# Altium PCB FC_F7_PCB.PcbDoc (part 2 of 2)
Units mm, origin at the board's own origin, x right, y up, seen from the top; angles counter-clockwise.
Board outline 36 x 36 mm, 4 copper layers (Top Layer, Ground Plane, Power Plane, Bottom Layer), stack 1.586 mm thick; 88 components, 73 nets, 327 pads, 57 vias.
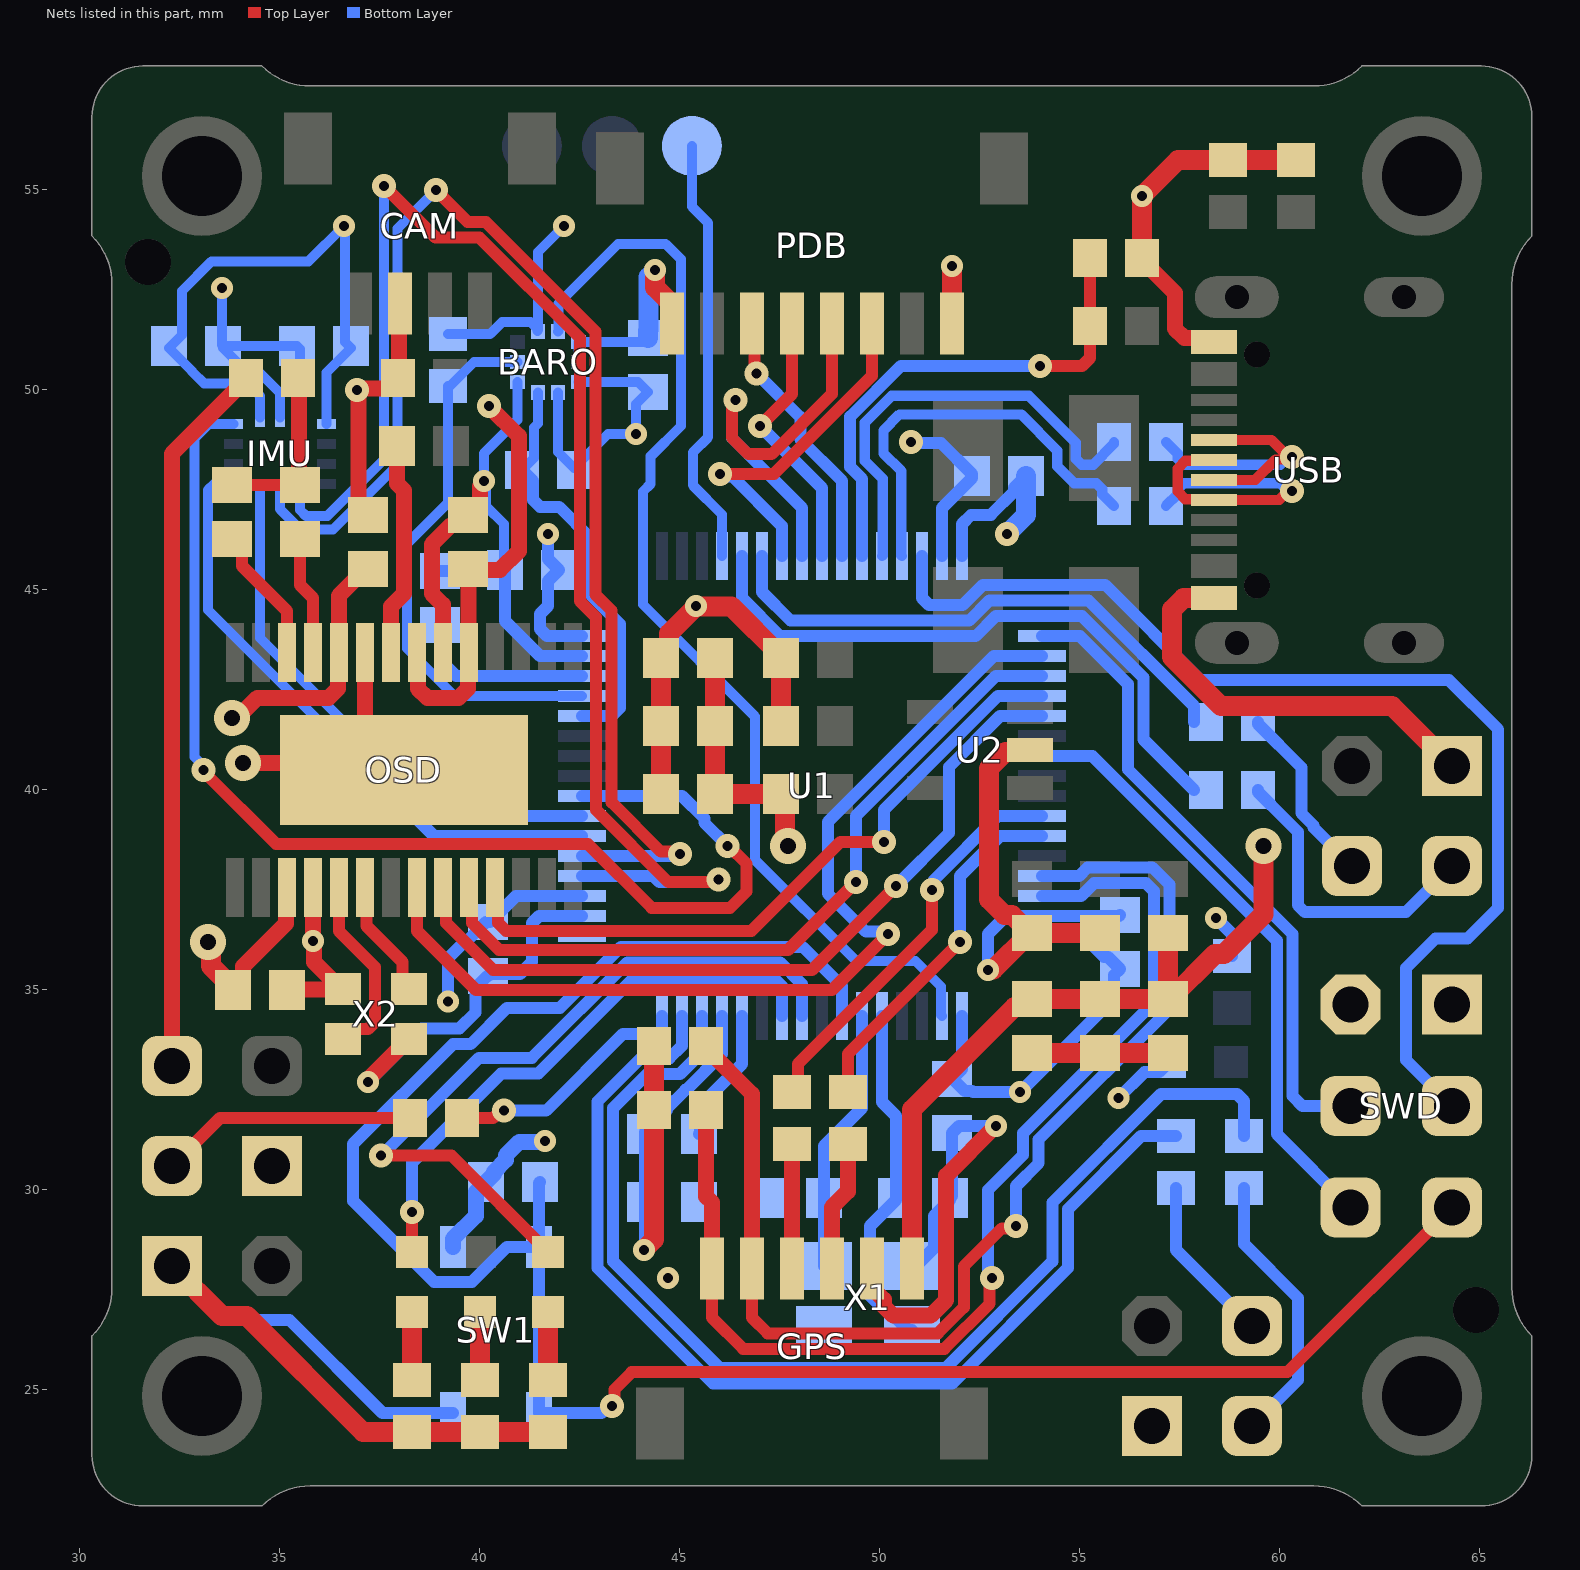
[diagram p4: the nets of this part, all layers, seen from the top]

## Via types
v1: diameter 0.6, hole 0.25, Top Layer to Bottom Layer, 30 vias
v2: diameter 0.55, hole 0.25, Top Layer to Bottom Layer, 21 vias
v3: diameter 0.9, hole 0.4, Top Layer to Bottom Layer, 6 vias

## Nets (pads, with @x,y where several pads share a name; then routed paths per layer and width w, separated by ;. In a path a pad name is that pad's centre, name@x,y a point inside that pad or via, vN(x,y) a via of type N, cw(c..) or ccw(c..) an arc to the next point about the centre after c; other vN are vias at no path point) (continued)
GND: BARO.3 BARO.8 BARO.9 C1.2 C2.1 C3.2 C4.1 C5.1 C6.1 C7.1 C8.1 C9.1 C10.1 C11.1 C12.1 C13.1 C14.1 C15.1 C16.1 C17.1 C18.1 C19.1 C20.1 C21.1 C22.2 C23.2 C24.2 C28.1 C29.1 C30.1 CAM.2 G.1 GPS.2 IMU.6 IMU.7 J2.1 J6.1 J11.1 OSD.4 OSD.20 OSD.23 OSD.29 PDB.1 PDB.8 R1.1 R9.2 R13.2 R14.2 R17.2 R18.2 R19.2 R23.1 SW1.3 SW1.4 SWD.6 U1.12 U1.18 U1.31 U1.47 U1.63 U2.2 USB.A1_B12 USB.B1_A12 X1.2 X1.4 X2.2 X2.4 | length 147.9
  Top Layer w0.4: v3(34.08,40.68) 36.48,40.68 OSD.29@37.2,41.4 ; C28.1@35.2,35.025 35.213,35.013 36.562,35.013 X2.4@36.575,35.025 36.525,35.025 35.854,35.696 35.854,36.196 v2(35.825,36.224) OSD.4@35.825,37.562 ; v1@36.921,49.946 37.013,50.038 37.725,50.038 37.975,50.288 37.975,52.143 CAM.2@38,52.168 ; v1(36.921,50) 36.959,49.962 36.959,47.116 C29.1@37.2,46.875 ; OSD.23@37.125,43.438 37.125,41.475 OSD.29@37.2,41.4 ; v2(37.2,32.7) 37.2,32.75 X2.2@38.225,33.775 ; OSD.29@38.1,40.5 OSD.29@37.2,41.4 ; OSD.20@39.075,43.438 39.075,44.634 38.8,44.909 38.8,46.141 39.284,46.625 39.5,46.625 40,47.125 40,47.586 40.096,47.682 v2(40.096,47.723) ; GPS.2@49.8,28.032 49.9,27.932 49.9,27.457 50.1,27.257 50.1,27.091 50.334,26.857 51.266,26.857 51.656,27.247 51.656,30.356 v2(52.9,31.6) ; R9.2@56.55,53.3 56.55,53.25 57.375,52.425 57.375,51.534 57.609,51.3 58.245,51.3 USB.B1_A12@58.345,51.2
  Top Layer w0.5: J6.1@32.3,28.1 33.546,26.854 34.171,26.854 37.075,23.95 R19.2@41.7,23.95 ; v2(44.371,52.998) 44.381,52.988 44.381,52.562 44.75,52.193 44.75,51.718 PDB.1@44.8,51.668 ; C5.1@44.525,39.9 C6.1@44.525,41.6 C7.1@44.525,43.3 44.725,43.5 44.725,43.911 45.4,44.586 v2(45.4,44.6) 45.41,44.59 46.285,44.59 47.525,43.35 C4.1@47.525,43.3 C9.1@47.525,41.6 ; PDB.8@51.8,51.668 v2(51.8,53.1) ; v2@52.71,35.51 52.835,35.51 C8.1@53.75,36.425 ; U2.2@53.75,41 53.7,40.95 53.139,40.95 52.725,40.536 52.725,37.264 53.114,36.875 53.3,36.875 C8.1@53.75,36.425 ; C13.1@53.8,33.425 C11.1@55.5,33.425 C12.1@57.2,33.425 ; C10.1@55.5,36.425 C8.1@53.75,36.425 ; R9.2@56.55,53.3 v2(56.55,54.85) 57.45,55.75 R13.2@58.7,55.75 R14.2@60.4,55.75 ; USB.A1_B12@58.345,44.8 57.593,44.8 57.3,44.507 57.3,43.32 58.52,42.1 62.8,42.1 G.1@64.3,40.6
  Bottom Layer w0.25: v2(33.549,52.551) 33.549,51.126 C23.2@33.575,51.1 ; IMU.6@35,49.313 35,49.925 34.426,50.499 34.126,50.499 33.575,51.05 33.625,51.1 C22.2@35.425,51.1 35.5,51.025 IMU.7@35.5,49.313 ; C17.1@40.6,45.475 40.6,46.649 40.153,47.096 40.153,47.666 v2(40.096,47.723) 40.096,48.414 40.938,49.255 BARO.3@40.938,50.2 ; BARO.9@42.463,50.7 BARO.8@42.463,51.2 44.1,51.2 C24.2@44.2,51.3
  Bottom Layer w0.3: J6.1@32.3,28.1 33.646,26.754 35.234,26.754 37.563,24.425 SW1.3@39.325,24.425 ; v2(37.2,32.7) 38.537,34.037 39.485,34.037 39.883,34.435 39.883,35.05 40.183,35.35 C18.1@40.2,35.35 40.25,35.4 41,35.4 41.3,35.7 41.3,36.674 41.476,36.85 U1.18@42.55,36.85 ; C21.1@39,45.475 40.6,45.475 C17.1@40.625,45.5 40.625,44.225 41.5,43.35 U1.31@42.55,43.35 ; C20.1@45.475,31.4 45.5,31.425 45.5,32.1 46.55,33.15 U1.12@46.55,34.35 ; v1(50.771,48.703) 50.795,48.679 51.521,48.679 52.3,47.9 52.3,47.8 51.55,47.05 U1.47@51.55,45.85 ; X1.4@50.8,28.1 50.9,28.1 51.35,28.55 51.35,29.35 51.75,29.75 C1.2@51.75,29.8 51.8,29.85 C14.1@51.8,31.425 51.975,31.6 v2(52.9,31.6) ; v2(52.7,35.5) 52.7,36.4 53.15,36.85 U1.63@54.05,36.85 55.975,36.85 C15.1@56,36.875 ; v2(58.4,36.8) 58.8,36.4 R1.1@58.8,35.85
  Bottom Layer w0.4: SW1.4@39.325,28.575 39.325,28.775 39.9,29.35 39.9,29.95 40.354,30.404 40.354,30.454 40.65,30.75 40.65,30.866 40.985,31.2 41.602,31.2 v2(41.63,31.229)
  Bottom Layer w0.5: C24.2@44.2,51.3 44.2,51.487 44.213,51.5 44.213,52.826 44.371,52.984 v2(44.371,52.998)
  other v2: 44.7,27.8
GPS_IN: GPS.3 R2.1 | length 3.3
  Top Layer w0.4: GPS.3@48.8,28.032 48.8,29.566 49.2,29.966 R2.1@49.2,31.15
GPS_OUT: GPS.4 R5.1 | length 3.1
  Top Layer w0.4: GPS.4@47.8,28.032 R5.1@47.8,31.15
HSE_IN: C1.1 U1.5 X1.1 | length 8.8
  Bottom Layer w0.3: U1.5@50.05,34.35 50.05,32.2 50.4,31.85 50.4,29.75 49.75,29.1 49.75,27.355 49.955,27.15 50.05,27.15 50.7,26.5 X1.1@50.8,26.5
HSE_OUT: C2.2 U1.6 X1.3 | length 6.6
  Bottom Layer w0.3: X1.3@48.6,28.1 C2.2@48.6,29.8 48.6,31.1 49.55,32.05 U1.6@49.55,34.35
I2C1_EXTI: BARO.7 U1.2 | length 27.8
  Bottom Layer w0.25: BARO.7@41.95,51.463 41.965,51.478 41.965,52.165 43.452,53.652 44.642,53.652 45.025,53.269 45.025,49.1 44.269,48.344 44.269,47.655 44.075,47.462 44.075,44.638 46.871,41.842 46.871,38.257 49.407,35.721 50.889,35.721 51.525,35.085 51.525,34.375 U1.2@51.55,34.35
I2C1_SCL: GPS.5 R3.1 U1.61 | length 29.3
  Top Layer w0.3: GPS.5@46.8,28.032 46.8,26.807 47.19,26.417 51.448,26.417 52.096,27.065 52.096,28.092 53.047,29.043 53.343,29.043 v1(53.4,29.1)
  Top Layer w0.4: R3.1@45.65,33.6 45.65,33.55 46.8,32.4 GPS.5@46.8,28.032
  Bottom Layer w0.3: v1(53.4,29.1) 53.4,30.1 53.969,30.669 53.969,31.264 57.24,34.535 57.24,37.632 56.807,38.065 55.193,38.065 54.978,37.85 U1.61@54.05,37.85
I2C1_SDA: GPS.6 R4.1 U1.62 | length 28.1
  Top Layer w0.3: GPS.6@45.8,28.032 45.8,26.807 46.58,26.027 51.609,26.027 52.743,27.16 52.743,27.743 v1(52.8,27.8)
  Top Layer w0.4: R4.1@45.65,32 45.65,29.841 45.8,29.691 GPS.6@45.8,28.032
  Bottom Layer w0.3: v1(52.8,27.8) 52.8,27.881 52.696,27.985 52.696,29.996 53.579,30.879 53.579,31.426 56.85,34.697 56.85,37.47 56.645,37.675 55.355,37.675 55.03,37.35 U1.62@54.05,37.35
I2C2_SCL: BARO.2 R7.2 U1.28 | length 10.4
  Bottom Layer w0.25: R7.2@41.05,48 41.35,48.3 41.35,49.063 41.45,49.163 BARO.2@41.45,49.937
  Bottom Layer w0.3: R7.2@41.05,48 41.325,47.725 41.325,47.255 41.501,47.079 41.981,47.079 42.775,46.285 42.775,44.87 43.5,44.145 43.5,42.055 43.295,41.85 U1.28@42.55,41.85
I2C2_SDA: BARO.4 R6.2 U1.29 | length 13.8
  Bottom Layer w0.25: BARO.4@40.938,50.7 39.85,50.7 39.25,50.1 R6.2@39.2,50.1 39.2,47.183 38.175,46.158 38.175,43.54 39.365,42.35 U1.29@42.55,42.35
NetC25_2: C25.2 C26.2 R22.1 | length 4.4
  Top Layer w0.3: C25.2@33.8,47.625 C26.2@35.5,47.625
  Top Layer w0.4: R22.1@35.45,50.3 35.475,50.275 35.475,47.65 C26.2@35.5,47.625
NetDATA_2: D.2 R19.1 | length 1.7
  Top Layer w0.5: R19.1@41.7,25.25 D.2@41.7,26.95
NetPWR_2: P.2 R18.1 | length 1.7
  Top Layer w0.5: R18.1@40,25.25 P.2@40,26.95
NetR17_1: R17.1 S.2 | length 1.7
  Top Layer w0.5: R17.1@38.3,25.25 S.2@38.3,26.95
NRST: C3.1 SW1.1 SW1.2 SWD.2 U1.7 | length 53.6
  Top Layer w0.3: v1(43.3,24.6) 43.357,24.657 43.357,25.009 43.794,25.446 60.186,25.446 SWD.2@64.3,29.56
  Bottom Layer w0.3: C3.1@41.5,30.2 41.475,30.175 SW1.2@41.475,28.575 ; v1(43.3,24.6) 43.219,24.6 43.044,24.425 SW1.1@41.475,24.425 SW1.2@41.475,28.575 ; U1.7@49.05,34.35 49.05,35.095 48.065,36.08 43.525,36.08 41.995,34.55 40.671,34.55 39.768,33.647 39.324,33.647 36.825,31.148 36.825,29.73 38.855,27.7 39.795,27.7 40.67,28.575 SW1.2@41.475,28.575
OSD_CLKIN: OSD.5 X2.1 | length 4.7
  Top Layer w0.3: OSD.5@36.475,37.562 36.475,36.47 37.375,35.57 37.375,34.201 37.199,34.025 36.825,34.025 X2.1@36.575,33.775
OSD_XFB: OSD.6 X2.3 | length 3
  Top Layer w0.3: OSD.6@37.125,37.562 37.162,37.525 37.162,36.6 38.063,35.699 38.063,35.187 X2.3@38.225,35.025
PIT_MODE_I/O: pad.5 U1.36 | length 10.9
  Bottom Layer w0.25: pad.5@45.3,56.1 45.3,54.581 45.705,54.176 45.705,48.818 45.321,48.434 45.321,47.619 46.05,46.89 U1.36@46.05,45.85
REC_RX: R21.1 RX6.1 | length 4.6
  Bottom Layer w0.3: R21.1@59.45,41.7 59.45,41.65 60.532,40.568 60.532,39.419 60.842,39.11 60.842,39.058 RX6.1@61.8,38.1
REC_TX: R20.1 TX6.1 | length 7.7
  Bottom Layer w0.3: R20.1@59.45,40 59.45,39.95 60.142,39.258 ; 60.142,39.258 60.446,38.954 60.446,37.122 60.622,36.946 63.146,36.946 TX6.1@64.3,38.1
S-AUD: J3.1 R10.1 | length 6.4
  Top Layer w0.3: J3.1@32.3,30.6 33.5,31.8 R10.1@38.25,31.8
SAG: C26.1 OSD.25 | length 3
  Top Layer w0.3: C26.1@35.5,46.275 35.5,45.125 35.825,44.8 OSD.25@35.825,43.438
SPARE_RX: J10.1 R16.1 | length 4.2
  Bottom Layer w0.3: R16.1@57.4,30.05 57.4,28.5 J10.1@59.3,26.6
SPARE_TX: J9.1 R15.1 | length 7
  Bottom Layer w0.3: R15.1@59.1,30.05 59.1,28.652 60.454,27.298 60.454,25.254 J9.1@59.3,24.1
SPI1_EXTI: IMU.4 U1.24 | length 30.3
  Top Layer w0.3: v1(33.092,40.499) 33.092,40.46 34.903,38.65 42.695,38.65 44.29,37.054 46.253,37.054 46.665,37.467 46.665,38.154 46.219,38.6 v1(46.192,38.6)
  Bottom Layer w0.25: v1(33.092,40.499) 33.092,40.593 32.864,40.822 32.864,48.789 33.225,49.15 IMU.4@33.838,49.15
  Bottom Layer w0.3: U1.24@42.55,39.85 45.05,39.85 45.61,39.29 45.61,39.182 v1(46.192,38.6)
SPI1_MISO: IMU.1 U1.22 | length 15.4
  Bottom Layer w0.25: IMU.1@33.838,47.65 33.35,47.65 33.204,47.504 33.204,44.496 38.3,39.4
  Bottom Layer w0.3: 38.3,39.4 38.85,38.85 U1.22@42.55,38.85
SPI1_MOSI: IMU.14 U1.23 | length 13.6
  Bottom Layer w0.25: IMU.14@34.5,47.488 34.5,43.8 38.5,39.8
  Bottom Layer w0.3: 38.5,39.8 38.95,39.35 U1.23@42.55,39.35
SPI1_NCS: IMU.12 U1.20 | length 35.8
  Top Layer w0.3: v1(37.6,55.1) 38.889,53.811 39.986,53.811 42.496,51.301 42.496,44.725 42.9,44.32 42.9,39.504 44.708,37.696 45.817,37.696 45.88,37.758 v1(45.961,37.758)
  Bottom Layer w0.25: IMU.12@35.5,47.488 35.5,47 35.646,46.854 36.188,46.854 37.6,48.265 v1(37.6,55.1)
  Bottom Layer w0.3: U1.20@42.55,37.85 44.332,37.85 44.486,37.696 45.817,37.696 45.88,37.758 v1(45.961,37.758)
SPI1_SCK: IMU.13 U1.21 | length 33.7
  Top Layer w0.3: v1(38.9,54.994) 39.693,54.201 40.147,54.201 42.886,51.463 42.886,44.886 43.29,44.482 43.29,39.69 44.523,38.457 44.943,38.457 v1(45,38.4)
  Bottom Layer w0.25: IMU.13@35,47.488 35,47.019 35.506,46.514 36.329,46.514 37.94,48.125 37.94,54.034 v1(38.9,54.994)
  Bottom Layer w0.3: U1.21@42.55,38.35 44.95,38.35 v1(45,38.4)
SPI3_MISO: OSD.11 U1.52 | length 17.5
  Top Layer w0.3: OSD.11@40.375,37.562 40.45,37.487 40.45,36.68 40.655,36.474 46.782,36.474 49.008,38.7 v1(50.1,38.7)
  Bottom Layer w0.3: v1(50.1,38.7) 50.1,39.502 52.948,42.35 U1.52@54.05,42.35
SPI3_MOSI: OSD.9 U1.53 | length 19.9
  Top Layer w0.3: OSD.9@39.075,37.562 39.15,37.487 39.15,36.68 40.33,35.5 48.3,35.5 v1(50.4,37.6)
  Bottom Layer w0.3: v1(50.4,37.6) 51.729,38.929 51.729,40.579 53,41.85 U1.53@54.05,41.85
SPI3_NCS: OSD.8 U1.50 | length 24.8
  Top Layer w0.3: OSD.8@38.425,37.562 38.425,36.475 39.9,35 48.8,35 v1(50.2,36.4)
  Bottom Layer w0.3: v1(50.2,36.4) 50.143,36.457 49.647,36.457 48.696,37.408 48.696,39.201 52.845,43.35 U1.50@54.05,43.35
SPI3_SCK: OSD.10 U1.51 | length 19.3
  Top Layer w0.3: OSD.10@39.725,37.562 39.8,37.487 39.8,36.68 40.48,36 47.7,36 v1(49.4,37.7)
  Bottom Layer w0.3: v1(49.4,37.7) 49.396,37.704 49.396,39.349 52.897,42.85 U1.51@54.05,42.85
STATUS_LED: S.1 U1.10 | length 14.2
  Top Layer w0.3: S.1@38.3,28.45 v1(38.3,29.446)
  Bottom Layer w0.3: v1(38.3,29.446) 38.3,30.681 40.531,32.912 41.46,32.912 43.848,35.3 47.345,35.3 47.55,35.095 U1.10@47.55,34.35
SWCLK: SWD.3 U1.49 | length 16.2
  Bottom Layer w0.3: U1.49@54.05,43.85 54.995,43.85 56.197,42.648 56.197,40.514 60.315,36.397 60.315,32.345 60.56,32.1 SWD.3@61.76,32.1
SWDIO: SWD.4 U1.46 | length 28.6
  Bottom Layer w0.3: U1.46@51.05,45.85 51.05,44.8 51.226,44.624 52.069,44.624 52.575,45.13 55.631,45.13 58.01,42.751 64.22,42.751 65.454,41.517 65.454,37.054 64.692,36.292 63.892,36.292 63.146,35.546 63.146,33.254 SWD.4@64.3,32.1
"TIM1_CH1 (M2)": PDB.4 U1.41 | length 6.8
  Top Layer w0.3: v1(47,49.1) 47.8,49.9 PDB.4@47.8,51.668
  Bottom Layer w0.3: v1(47,49.1) 48.55,47.55 U1.41@48.55,45.85
"TIM1_CH2 (M1)": PDB.3 U1.42 | length 6.7
  Top Layer w0.3: PDB.3@46.8,51.668 46.857,51.611 46.857,50.475 v1(46.914,50.418)
  Bottom Layer w0.3: v1(46.914,50.418) 48.011,49.321 48.011,48.766 49.05,47.727 U1.42@49.05,45.85
"TIM3_CH3 (M4)": PDB.6 U1.39 | length 9
  Top Layer w0.3: v1(46,47.9) 47.347,47.9 49.8,50.353 PDB.6@49.8,51.668
  Bottom Layer w0.3: v1(46,47.9) 46.057,47.843 46.302,47.843 47.55,46.595 U1.39@47.55,45.85
"TIM3_CH4 (M3)": PDB.5 U1.40 | length 10.7
  Top Layer w0.3: v1(46.384,49.748) 46.384,49.667 46.296,49.579 46.296,48.808 46.708,48.396 47.292,48.396 48.8,49.904 PDB.5@48.8,51.668
  Bottom Layer w0.3: v1(46.384,49.748) 46.384,49.667 46.296,49.579 46.296,48.808 48.05,47.054 U1.40@48.05,45.85
TRACESWO: SWD.1 U1.55 | length 15.2
  Bottom Layer w0.3: U1.55@54.05,40.85 55.31,40.85 59.925,36.235 59.925,31.395 SWD.1@61.76,29.56
UART4_RX: R16.2 U1.15 | length 26.7
  Bottom Layer w0.3: U1.15@45.05,34.35 45.05,33.605 44.735,33.29 44.018,33.29 42.935,32.207 42.935,28.053 45.828,25.16 51.807,25.16 54.7,28.053 54.7,29.523 56.527,31.35 R16.2@57.4,31.35
UART4_TX: R15.2 U1.14 | length 29.1
  Bottom Layer w0.3: U1.14@45.55,34.35 45.55,33.45 45,32.9 44.18,32.9 43.325,32.045 43.325,28.215 45.99,25.55 51.645,25.55 54.31,28.215 54.31,29.684 57.026,32.401 58.924,32.401 59.1,32.225 R15.2@59.1,31.35
USART1_RX: R2.2 U1.59 | length 9
  Top Layer w0.3: R2.2@49.2,32.45 49.2,33.404 v1(51.996,36.2)
  Bottom Layer w0.3: v1(51.996,36.2) 52,36.204 52,37.85 53,38.85 U1.59@54.05,38.85
USART1_TX: R5.2 U1.58 | length 10.1
  Top Layer w0.3: R5.2@47.8,32.45 47.945,32.595 47.945,33.149 51.296,36.5 v1(51.296,37.5)
  Bottom Layer w0.3: v1(51.296,37.5) 51.353,37.557 51.353,37.755 52.948,39.35 U1.58@54.05,39.35
USART2_RX: U1.17
USART2_TX: R10.2 U1.16 | length 6.3
  Top Layer w0.3: R10.2@39.55,31.8 39.552,31.798 40.332,31.798 40.516,31.983 v1(40.597,31.983)
  Bottom Layer w0.3: v1(40.597,31.983) 41.656,31.983 43.573,33.9 44.55,33.9 U1.16@44.55,34.35
USART6_RX: R21.2 U1.38 | length 13.7
  Bottom Layer w0.3: U1.38@47.05,45.85 47.05,44.95 47.766,44.234 52.231,44.234 52.737,44.74 55.208,44.74 57.85,42.098 R21.2@57.85,41.7
USART6_TX: R20.2 U1.37 | length 15.7
  Bottom Layer w0.3: U1.37@46.55,45.85 46.55,44.8 47.506,43.844 52.392,43.844 52.898,44.35 55.047,44.35 56.587,42.809 56.587,41.263 R20.2@57.85,40
USB_D_N: R12.1 USB.A7 USB.B7 | length 8.1
  Top Layer w0.26: USB.A7@58.345,48.25 58.325,48.23 57.633,48.23 57.44,48.037 57.44,47.463 57.633,47.27 58.325,47.27 USB.B7@58.345,47.25 59.985,47.25 60.208,47.473 v1(60.3,47.473)
  Bottom Layer w0.26: R12.1@57.15,47.1 57.445,47.395 57.445,47.516 57.597,47.668 60.013,47.668 60.208,47.473 v1(60.3,47.473)
USB_D_P: R11.1 USB.A6 USB.B6 | length 7.9
  Top Layer w0.26: USB.A6@58.345,47.75 59.384,47.75 59.896,48.262 60.235,48.262 v1(60.3,48.327) 60.208,48.327 59.785,48.75 USB.B6@58.345,48.75
  Bottom Layer w0.26: R11.1@57.15,48.7 57.445,48.405 57.445,48.284 57.597,48.132 60.013,48.132 60.208,48.327 v1(60.3,48.327)
USB_DETECT: R8.1 R9.1 U1.43 | length 12.7
  Top Layer w0.3: v1(54,50.6) 55.05,50.6 55.25,50.8 R9.1@55.25,53.3
  Bottom Layer w0.3: U1.43@49.55,45.85 49.55,47.778 49.253,48.075 49.253,49.332 50.522,50.6 v1(54,50.6)
USB_FS_D_N: R11.2 U1.44 | length 11.2
  Bottom Layer w0.26: U1.44@50.05,45.85 50.068,45.868 50.068,47.783 49.624,48.228 49.624,49.179 50.296,49.851 53.721,49.851 54.893,48.679 54.893,48.284 55.046,48.132 55.332,48.132 55.85,48.65 R11.2@55.85,48.7
USB_FS_D_P: R12.2 U1.45 | length 10.5
  Bottom Layer w0.26: U1.45@50.55,45.85 50.532,45.868 50.532,47.975 50.087,48.42 50.087,48.987 50.488,49.387 53.53,49.387 54.43,48.487 54.43,48.092 54.854,47.668 55.403,47.668 55.555,47.516 55.555,47.395 R12.2@55.85,47.1
USB_LED: D.1 U1.9 | length 18.7
  Top Layer w0.3: v1(37.529,30.857) 39.293,30.857 D.1@41.7,28.45
  Bottom Layer w0.3: v1(37.529,30.857) 39.975,33.302 41.298,33.302 43.687,35.69 47.507,35.69 48.05,35.147 U1.9@48.05,34.35
VCAP1: C21.2 U1.30 | length 4.6
  Bottom Layer w0.3: C21.2@39,44.125 39,43.252 39.402,42.85 U1.30@42.55,42.85
VDD_5: C11.2 C12.2 C13.2 C28.2 C29.2 C30.2 FB2.2 GPS.1 OSD.3 OSD.19 OSD.21 OSD.24 | length 39.5
  Top Layer w0.4: v3(33.8,41.8) 33.935,41.8 34.436,42.3 36.216,42.3 36.45,42.535 36.45,43.413 OSD.24@36.475,43.438 36.475,44.85 37.15,45.525 C29.2@37.2,45.525 ; C28.2@33.975,35.2 34.075,35.3 34.075,35.584 35.15,36.659 35.15,37.537 OSD.3@35.175,37.562 ; OSD.21@38.425,43.438 38.45,43.413 38.45,42.535 38.684,42.3 39.466,42.3 39.7,42.535 39.7,43.413 OSD.19@39.725,43.438 39.713,43.45 C30.2@39.713,45.512 ; C30.2@39.7,45.525 C30.2@39.713,45.512 ; v1(40.223,49.597) 40.971,48.849 40.971,45.971 40.5,45.5 39.725,45.5 C30.2@39.713,45.512
  Top Layer w0.5: v3(33.204,36.2) 33.281,36.123 33.281,35.594 33.825,35.05 C28.2@33.825,35 ; GPS.1@50.8,28.032 50.8,32.011 53.364,34.575 53.6,34.575 C13.2@53.8,34.775 C12.2@57.2,34.775 ; FB2.2@57.2,36.425 C12.2@57.2,34.775 ; v3(59.592,38.6) 59.592,36.89 58.596,35.894 58.369,35.894 57.25,34.775 C12.2@57.2,34.775
VDD_MCU: BARO.1 BARO.6 BARO.10 BOOT.1 C5.2 C6.2 C7.2 C14.2 C15.2 C16.2 C17.2 C18.2 C19.2 C20.2 C22.1 C23.1 C24.1 FB1.2 IMU.5 IMU.8 R3.2 R4.2 R6.1 R7.1 SWD.5 U1.1 U1.13 U1.19 U1.32 U1.48 U1.64 | length 70.6
  Top Layer w0.5: v2(44.1,28.5) 44.1,28.514 44.35,28.764 R4.2@44.35,32 R3.2@44.35,33.6 ; C7.2@45.875,43.3 C6.2@45.875,41.6 C5.2@45.875,39.9 FB1.2@47.525,39.9 47.623,39.802 47.623,38.677 v3(47.7,38.6)
  Bottom Layer w0.25: IMU.5@34.5,49.313 34.5,49.854 34.194,50.159 33.106,50.159 32.8,50.465 32.8,50.475 32.225,51.05 32.55,51.375 32.55,52.477 33.282,53.209 35.709,53.209 v2(36.6,54.1) 36.629,54.071 36.629,51.196 36.775,51.05 36.163,50.437 IMU.8@36.163,49.15 ; R6.1@39.25,51.4 R6.1@39.2,51.4 40.255,51.4 40.555,51.7 41.26,51.7 41.435,51.525 41.435,51.478 41.45,51.493 41.45,53.45 v2(42.1,54.1) ; BARO.1@41.95,49.937 41.95,48.45 42.35,48.05 43.2,48.9 v2(43.9,48.9) 43.9,49.65 C24.1@44.2,49.95 43.95,50.2 BARO.10@42.463,50.2
  Bottom Layer w0.3: v2(39.204,34.716) 39.204,35.799 39.562,36.157 39.607,36.157 40.15,36.7 C18.2@40.2,36.7 40.25,36.7 40.9,37.35 U1.19@42.55,37.35 ; v2(41.7,46.4) 41.7,45.775 C17.2@41.975,45.5 41.7,45.225 41.7,44.6 41.5,44.4 41.5,44.026 41.676,43.85 U1.32@42.55,43.85 ; v2(44.1,28.5) 44.125,28.525 C19.2@44.125,29.7 C20.2@44.125,31.4 44.125,31.45 44.675,32 44.675,32.045 45.14,32.51 45.162,32.51 46.05,33.398 U1.13@46.05,34.35 ; C14.2@51.8,32.775 52.05,33.025 U1.1@52.05,34.35 ; C14.2@51.822,32.775 52.122,32.475 52.297,32.475 52.326,32.446 v2(53.5,32.446) 55.855,34.801 55.855,35.38 C15.2@56,35.525 55.7,35.825 55.605,35.825 55.08,36.35 U1.64@54.05,36.35 ; U1.48@52.05,45.85 52.05,46.65 52.278,46.878 52.772,46.878 53.35,47.455 53.35,47.55 C16.2@53.65,47.85 ; v2(55.96,32.295) 56.615,32.95 56.975,32.95 BOOT.1@57.225,33.2
  Bottom Layer w0.5: v1(53.175,46.4) 53.65,46.875 C16.2@53.65,47.85
VID_IN: C27.2 OSD.22 | length 5.4
  Top Layer w0.4: OSD.22@37.775,43.438 37.775,44.584 38.1,44.909 38.1,47.491 37.925,47.666 C27.2@37.925,48.6
VID_OUT: C25.1 OSD.26 | length 3.4
  Top Layer w0.3: C25.1@33.8,46.275 34.05,46.025 34.05,45.6 35.175,44.475 OSD.26@35.175,43.438
VTX: J1.1 R22.2 | length 18
  Top Layer w0.4: J1.1@32.3,33.1 32.3,48.4 34.15,50.25 R22.2@34.15,50.3
pads on no net: BARO.5 CAM.M GPS.M IMU.2 IMU.3 IMU.9 IMU.10 IMU.11 OSD.1 OSD.2 OSD.7 OSD.12 OSD.13 OSD.14 OSD.15 OSD.16 OSD.17 OSD.18 OSD.27 OSD.28 PDB.M U1.3 U1.4 U1.8 U1.11 U1.27 U1.33 U1.34 U1.54 U1.56 U1.57 U2.4 USB. USB.A8 USB.B8 USB.S1 USB.S2 USB.S3 USB.S4

## Polygon pours and split planes (outlines as drawn)
GND on Top Layer "TOP_GND" (solid, pour order 4): 30.3,23.37 30.3,26.35 ccw(c29.093,27.557) 30.8,27.557 30.8,52.643 ccw(c29.093,52.643) 30.3,53.85 30.3,56.83 cw(c31.57,56.83) 31.57,58.1 34.55,58.1 ccw(c35.757,59.307) 35.757,57.6 60.843,57.6 ccw(c60.843,59.307) 62.05,58.1 65.03,58.1 cw(c65.03,56.83) 66.3,56.83 66.3,53.85 ccw(c67.507,52.643) 65.8,52.643 65.8,27.557 ccw(c67.507,27.557) 66.3,26.35 66.3,23.37 cw(c65.03,23.37) 65.03,22.1 62.05,22.1 ccw(c60.843,20.893) 60.843,22.6 35.757,22.6 ccw(c35.757,20.893) 34.55,22.1 31.57,22.1 cw(c31.57,23.37)
GND on Bottom Layer "BOT_GND" (solid, pour order 5): 30.3,23.37 30.3,26.35 ccw(c29.093,27.557) 30.8,27.557 30.8,52.643 ccw(c29.093,52.643) 30.3,53.85 30.3,56.83 cw(c31.57,56.83) 31.57,58.1 34.55,58.1 ccw(c35.757,59.307) 35.757,57.6 60.843,57.6 ccw(c60.843,59.307) 62.05,58.1 65.03,58.1 cw(c65.03,56.83) 66.3,56.83 66.3,53.85 ccw(c67.507,52.643) 65.8,52.643 65.8,27.557 ccw(c67.507,27.557) 66.3,26.35 66.3,23.37 cw(c65.03,23.37) 65.03,22.1 62.05,22.1 ccw(c60.843,20.893) 60.843,22.6 35.757,22.6 ccw(c35.757,20.893) 34.55,22.1 31.57,22.1 cw(c31.57,23.37)
VDD_MCU on Power Plane (split plane): 152 vertices, not listed, extent 30.809,22.609 65.791,57.591
+5 on Power Plane (split plane): 42.949,49.779 42.949,49.621 41.164,47.836 41.153,47.82 41.149,47.8 41.149,45.4 41.153,45.38 41.164,45.364 43.749,42.779 43.749,37.3 43.753,37.28 43.764,37.264 50.264,30.764 50.28,30.753 50.3,30.749 56.4,30.749 56.42,30.753 56.436,30.764 56.936,31.264 56.947,31.28 56.951,31.3 56.951,32.4 56.951,39.279 60.021,42.349 62.879,42.349 63.349,41.879 63.349,39.7 63.353,39.68 63.364,39.664 65.049,37.979 65.049,33.021 57.264,25.236 56.279,24.251 36.421,24.251 34.736,25.936 33.051,27.621 33.051,28.879 33.421,29.249 35.779,29.249 39.364,25.664 39.38,25.653 39.4,25.649 54.5,25.649 54.52,25.653 54.536,25.664 55.436,26.564 63.236,34.364 63.243,34.374 63.247,34.38 63.251,34.4 63.251,37.1 63.247,37.12 63.243,37.126 63.236,37.136 61.336,39.036 60.536,39.836 60.52,39.847 60.5,39.851 59.3,39.851 59.28,39.847 59.264,39.836 58.564,39.136 58.553,39.12 58.549,39.1 58.549,33.5 58.549,33 58.549,32.371 55.829,29.651 48.771,29.651 40.836,37.436 39.751,38.521 39.751,47.579 41.036,48.864 41.047,48.88 41.051,48.9 41.051,50.1 41.047,50.12 41.036,50.136 40.636,50.536 40.62,50.547 40.6,50.551 39.8,50.551 39.78,50.547 39.764,50.536 39.079,49.851 34.821,49.851 34.751,49.921 34.751,52.779 35.221,53.249 39.479,53.249
VDD_5 on Power Plane (split plane): 40.949,50.079 40.949,48.921 39.664,47.636 39.653,47.62 39.649,47.6 39.649,38.5 39.653,38.48 39.664,38.464 40.764,37.364 48.714,29.564 48.722,29.558 48.73,29.553 48.731,29.553 48.741,29.551 48.75,29.549 55.85,29.549 55.87,29.553 55.886,29.564 58.636,32.314 58.647,32.33 58.651,32.35 58.651,33 58.651,39.079 59.321,39.749 60.449,39.749 60.449,33.221 53.879,26.651 49.321,26.651 45.336,30.636 39.736,36.236 39.72,36.247 39.7,36.251 37.3,36.251 37.28,36.247 37.264,36.236 35.979,34.951 31.951,34.951 31.951,40.979 38.236,47.264 38.247,47.28 38.251,47.3 38.251,47.879 38.936,48.564 38.947,48.58 38.951,48.6 38.951,49.579 39.821,50.449 40.579,50.449
GND on Ground Plane (split plane): 152 vertices, not listed, extent 30.809,22.609 65.791,57.591

## Keep-outs
Keep-Out Layer:
  lines w0.1: 30.8,52.6 30.8,52.643 ; 30.8,52.6 30.8,52.643 ; 30.8,52.6 30.8,27.557 cw(c29.093,27.557) 30.3,26.35 30.3,23.37 ccw(c31.57,23.37) 31.57,22.1 34.55,22.1 cw(c35.757,20.893) 35.757,22.6 60.843,22.6 cw(c60.843,20.893) 62.05,22.1 65.03,22.1 ccw(c65.03,23.37) 66.3,23.37 66.3,26.35 cw(c67.507,27.557) 65.8,27.557 65.8,52.643 cw(c67.507,52.643) 66.3,53.85 66.3,56.83 ccw(c65.03,56.83) 65.03,58.1 62.05,58.1 cw(c60.843,59.307) 60.843,57.6 35.8,57.6 35.757,57.6 cw(c35.757,59.307) 34.55,58.1 31.57,58.1 ccw(c31.57,56.83) 30.3,56.83 30.3,53.85 cw(c29.093,52.643) 30.8,52.643

## Other copper
Top Layer:
  pour cut-out: 56.55,54.85 56.55,52.75 56.5,52.7 59.1,52.7 59,52.8 59,55 58.2,55.8 57.8,55.8 57.2,55.2 56.8,55.2
  pour cut-out: 53.1,42.9 53.1,36.3 54.1,37.3 57.7,37.3 57.7,39.1 59.2,40.6 61.5,40.6 61.5,42.1 58.52,42.1 57.3,43.32 52.945,43.32 52.812,43.187
  pour cut-out: 46.086,53.593 46.2,53.479 46.2,52.3 46.3,52.2 52.5,52.2 52.5,53.502 52.123,53.879 46.372,53.879
  pour cut-out: 56.5,50.3 56.5,45.7 57.8,45.7 57.9,45.8 57.9,50.3
  pour cut-out: 52.75,50.907 52.5,50.657 52.5,42.9 56.5,42.9 56.5,51.1 52.8,51.1
  pour cut-out: 49.579,44.054 47.5,41.975 47.5,35.7 53.025,35.7 53.292,35.967 53.139,36.121 53.139,40.95 53.1,40.989 53.1,43.2 52.246,44.054
  pour cut-out: 51.7,32.5 51.7,25.7 51.8,25.6 56.5,25.6 56.5,32.682 56.182,33 52.8,33
  pour cut-out: 53.1,33.7 51.2,31.8 51.2,30.5 52.3,30.5 52.3,31.1 53.2,32
  pour cut-out: 39.8,35.2 49,35.2 49.104,35.305 49.104,33.296 49.673,32.727 49.673,28.032 48.732,28.032 46,25.3 44.9,25.3 44.8,25.4 44.8,22.8 44.6,22.6 35,22.6 34.5,22.1 31.2,22.1 30.2,23.1 30.2,26.2 30.3,26.3 30.3,31.2 30.9,31.8 33.5,31.8 34.2,32.5 37.3,32.5 39.8,35
  pour cut-out: 35.43,53.7 35.418,53.712 30.8,49.094 30.8,48.9 30.9,48.8 30.9,31.8 33.5,31.8 34.2,32.5 37.3,32.5 37.3,32.514 38.929,34.143 38.929,34.329 39.8,35.2 44.8,35.2 46.9,37.3 46.9,40.872 43.266,44.506 43.266,51.62 41.187,53.7 37.5,53.7
Bottom Layer:
  pour cut-out: 60.129,42.339 60.129,36.946 65.454,36.946 65.454,43.1 61.402,43.1
  pour cut-out: 42.55,38.85 42.55,34.099 38.3,34.099 38.3,38.85
  pour cut-out: 42.935,32.207 42.935,27.557 41.5,27.557 41.5,32.207
  pour cut-out: 33.204,44.496 36.456,41.244 32.675,41.244
  pour cut-out: 55.85,47.1 55.9,47.05 55.9,44.4 53.2,44.4 51.8,45.8 51.8,47.4 52.6,48.2 53.132,47.668 55.403,47.668
  pour cut-out: 52.737,44.74 52.737,41.449 48.696,37.408 43.882,37.408 43.441,37.85 43.5,37.909 43.5,44.329 45.55,46.379 50.521,46.379 51.05,45.85
  pour cut-out: 32.476,48.591 32.476,50.42 32.526,50.47 33.884,50.47 34.5,49.854 34.5,49 34.275,48.775
  pour cut-out: 41.8,40.8 41.8,39.4 41.75,39.35 38.95,39.35 34.5,43.8 34.5,47.488 34.551,47.539 37.835,47.539 37.835,43.4 40.385,40.85
  pour cut-out: 65.6,36.6 65.7,36.5 65.7,30.9 62.9,30.9 60.9,30.9 60.3,31.5 60.3,37 63.2,37 63.723,37.523 65.477,37.523 65.7,37.3
  pour cut-out: 61.299,32.401 61.76,31.94 61.76,28.16 60.6,27 54.6,27 54.1,27 54.1,29.474 57.026,32.401
  pour cut-out: 52.7,35.95 55.95,35.95 55.6,35.6 55.6,33.6 54.475,32.475 52.297,32.475 52,32.772 52,35.5
  pour cut-out: 46.871,38.257 48.528,36.6 48.585,36.6 48.065,36.08 43.32,36.08 42.55,36.85 42.55,37.85 42.957,38.257
  pour cut-out: 45.1,31.9 45.1,30 44.4,30 44.3,30.1 44.4,30.2 44.4,31.725
  pour cut-out: 38.6,51.9 39.227,51.9 39.727,51.4 43.1,51.4 45,53.3 45,54 43.9,55.1 43.9,56.1 41.6,56.1 41.5,56 40.8,56 38.9,54.1 38.9,52.6 38.3,52
Power Plane (plane layer: these items are gaps in the copper):
  lines w0.1: 39.1,49.8 38.5,49.8 34.8,49.8 34.7,49.9 34.7,52.8 35.2,53.3 36.1,53.3 39.5,53.3 43,49.8 43,49.6 41.2,47.8 41.2,45.4 43.8,42.8 43.8,37.3 50.3,30.8 56.4,30.8 56.9,31.3 56.9,32.4 56.9,39.3 60,42.4 62.9,42.4 63.4,41.9 63.4,39.7 65.1,38 65.1,33 57.3,25.2 56.3,24.2 53.8,24.2 36.4,24.2 34.7,25.9 33,27.6 33,28.9 33.4,29.3 35.8,29.3 39.4,25.7 54.5,25.7 55.4,26.6 63.2,34.4 63.2,37.1 61.3,39 60.5,39.8 ; 58.6,33.5 58.6,39.1 ; 40.8,37.4 39.7,38.5 39.7,47.6 41,48.9 41,50.1 40.6,50.5 40.1,50.5 39.8,50.5 38.9,49.6 38.9,48.6 38.2,47.9 38.2,47.3 31.9,41 31.9,34.9 36,34.9 37.3,36.2 39.7,36.2 45.3,30.6 49.3,26.6 53.9,26.6 60.5,33.2 60.5,39.8 ; 40.8,37.4 48.75,29.6 ; 40.8,37.4 48.75,29.6 ; 48.75,29.6 55.85,29.6 58.6,32.35 58.6,33 58.6,39.1 ; 58.6,39.1 59.3,39.8 ; 58.6,39.1 59.3,39.8 ; 59.3,39.8 60.5,39.8 ; 59.3,39.8 60.5,39.8

## Silkscreen, mask and mechanical layers (free items; w line width, h text height)
Top Overlay:
  text "1" at 47.198,56.973 h0.76 r90
  text "5" at 37.298,56.946 h0.76 r90
  text "G" at 38.398,56.946 h0.76 r90
  text "C" at 39.498,56.946 h0.76 r90
  text "A" at 40.498,56.946 h0.76 r90
  text "G" at 45.198,56.846 h0.76 r90
  text "2" at 48.198,56.846 h0.76 r90
  text "3" at 49.198,56.846 h0.76 r90
  text "4" at 50.198,56.846 h0.76 r90
  text "C" at 51.198,56.846 h0.76 r90
  text "G" at 52.198,56.846 h0.76 r90
  text "+5" at 46.198,56.084 h0.76 r90
  text "JLCJLCJLCJL" at 45.101,55 h0.6
  text "CAM" at 35.098,52.284 h0.76 r90
  text "PDB" at 42.898,51.684 h0.76 r90
  text "MW-FC-F7" at 42.652,45.552 h1.02
  text "V1" at 48.752,44.052 h1.02
  text "G" at 63.398,40.346 h0.76 r90
  text "+5" at 60.898,39.965 h0.76 r90
  text "RX6" at 60.898,37.084 h0.76 r90
  text "TX6" at 63.398,37.084 h0.76 r90
  text "OSD" at 32.798,36.484 h0.76 r90
  text "G" at 63.398,34.386 h0.76 r90
  text "VTX" at 33.202,34.116 h0.76 r270
  text "+3.3" at 60.858,33.307 h0.76 r90
  text "AUD" at 35.684,32.102 h0.76
  text "TX2" at 33.202,31.616 h0.76 r270
  text "IO" at 63.398,31.529 h0.76 r90
  text "CLK" at 60.858,31.084 h0.76 r90
  text "SDA" at 45.402,31.033 h0.76 r270
  text "SCL" at 46.402,31.033 h0.76 r270
  text "G" at 35.702,30.854 h0.76 r270
  text "+5" at 50.402,30.371 h0.76 r270
  text "T1" at 47.402,30.017 h0.76 r270
  text "R1" at 48.402,30.017 h0.76 r270
  text "G" at 49.402,29.609 h0.76 r270
  text "+5" at 35.702,28.735 h0.76 r270
  text "SWO" at 60.858,28.544 h0.76 r90
  text "RST" at 63.398,28.544 h0.76 r90
  text "G" at 33.202,28.354 h0.76 r270
  text "+5" at 56.165,27.502 h0.76
  text "RX4" at 58.284,27.502 h0.76
  text "GPS" at 53.102,27.316 h0.76 r270
  text "G" at 56.546,25.002 h0.76
  text "TX4" at 58.284,25.002 h0.76
  text "S" at 38.698,22.846 h0.76 r90
  text "P" at 40.398,22.846 h0.76 r90
  text "U" at 42.098,22.846 h0.76 r90
Bottom Overlay:
  lines w0.2: 36.5,45.3 36.8,45 ; 36.8,46.2 36.8,45 ; 37.1,45.3 36.8,45
  text "BARO" at 42.997,52.302 h0.76
  text "IMU" at 35.952,46.002 h0.76
  text "BOOT" at 56.598,32.802 h0.76
  text "RST" at 42.302,25.584 h0.76 r270